# Altium PCB Flex_debugging.PcbDoc
Units mm, origin at the board's own origin, x right, y up, seen from the top; angles counter-clockwise.
Board outline 100 x 30 mm, 2 copper layers (Top Layer, Bottom Layer); 5 components, 30 nets, 94 pads, 45 vias.
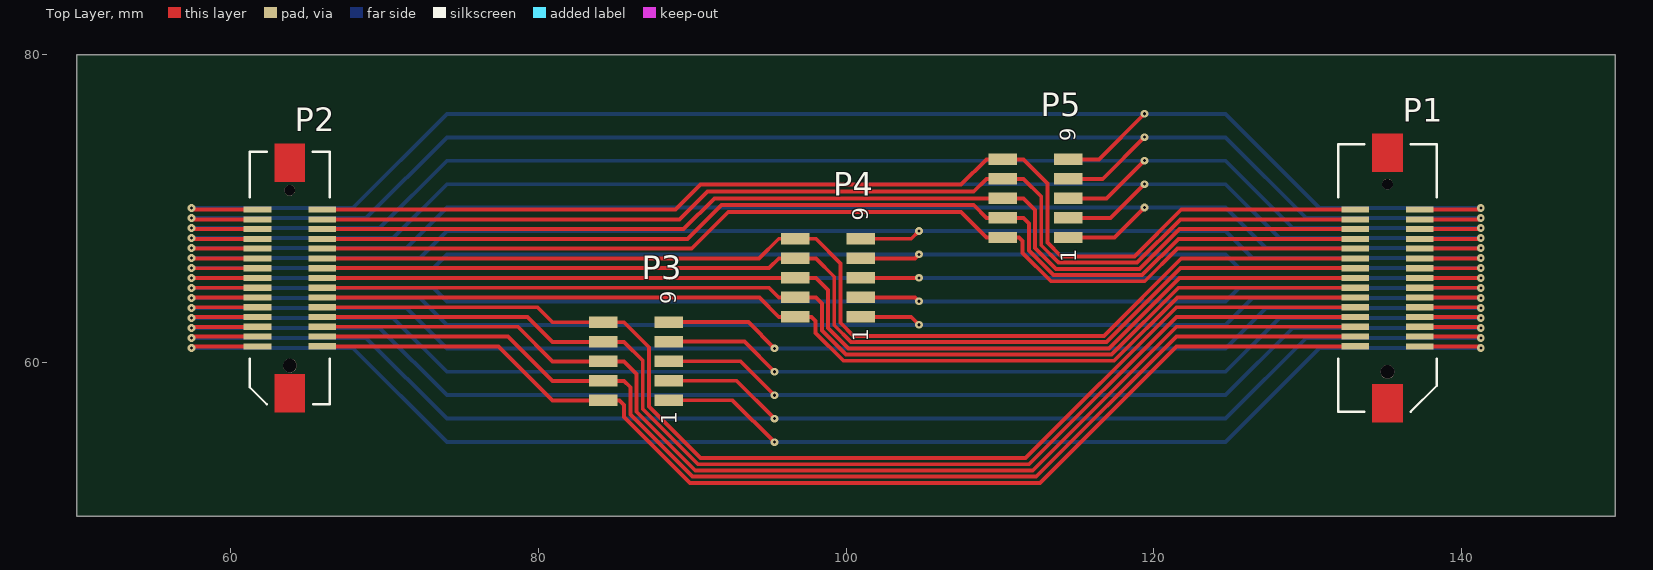
[diagram p0: Top Layer view]
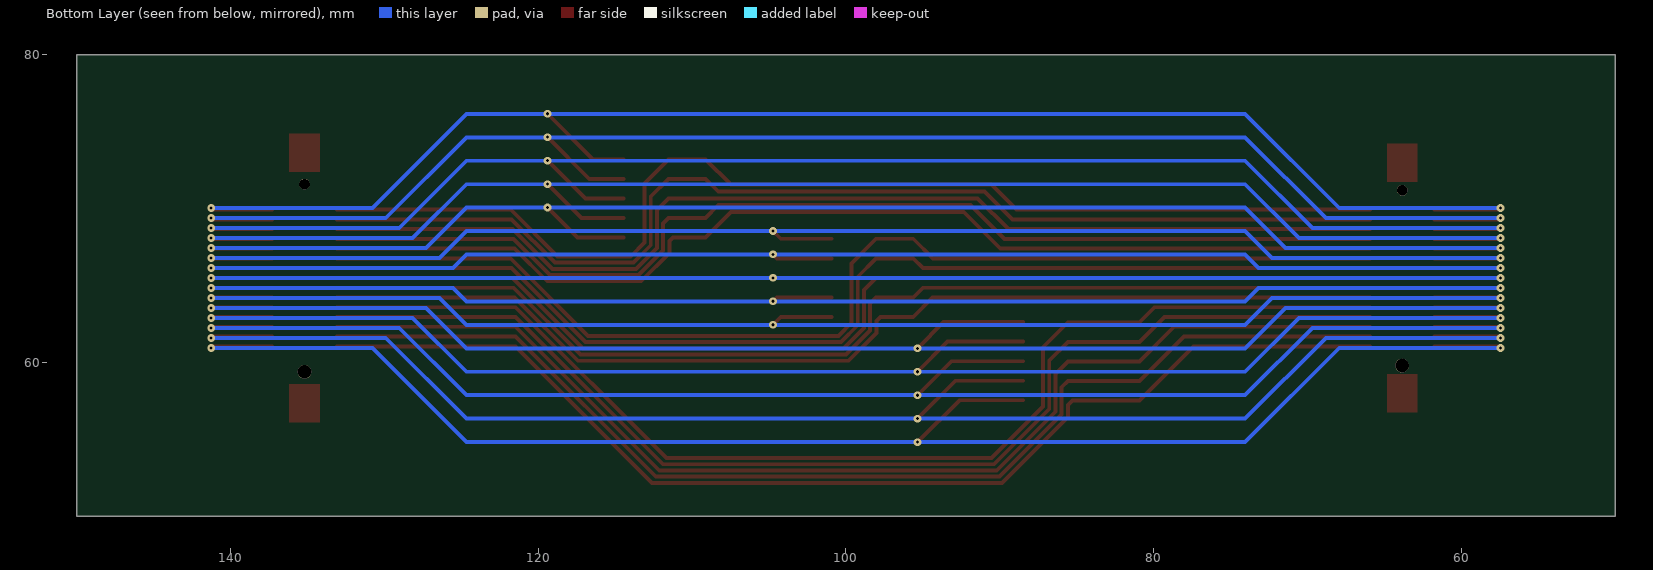
[diagram p1: Bottom Layer view, seen from below]
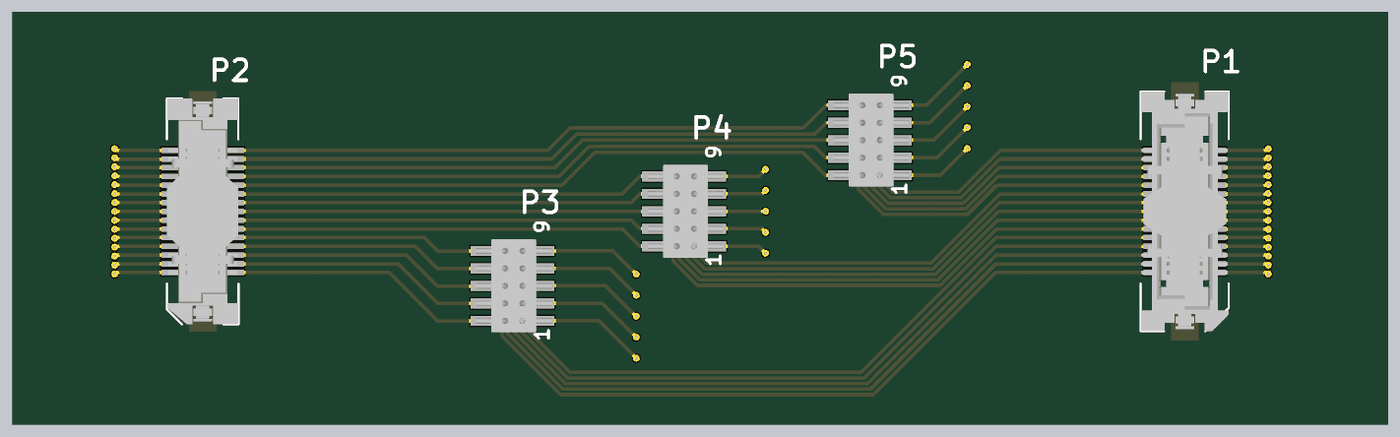
[diagram p2: 3D render of the assembled board from above, using the file's embedded part models]

## Layer stack, top to bottom
Top Solder: solder mask 0.0102, Solder Resist, Dk 3.5
Top Layer: signal copper 0.017
Dielectric 1: dielectric 0.32, FR-4, Dk 4.8
Bottom Layer: signal copper 0.017
Bottom Solder: solder mask 0.0102, Solder Resist, Dk 3.5

## Board outline
50,50 150,50 150,80 50,80

## Design rules (kind name [scope] priority, off if disabled: settings)
Clearance [All] p1: gap=0.15
PolygonConnect [All] p1: connectstyle=Relief reliefconductorwidth=0.254 reliefentries=4 polygonreliefangle="90 Angle" airgapwidth=0.254
RoutingVias [All] p1: holewidth=0.5 width=0.2 viastyle="Through Hole" minholewidth=0.5 minwidth=0.2 maxholewidth=1 maxwidth=0.5
SolderMaskExpansion [All] p1: expansion=0.102
Width [All] p1: maxlimit=0.254 minlimit=0.254 preferedwidth=0.254
29 further rules are at their usual default settings.

## Components (designator, comment, footprint, x,y, rotation, side; value= is the part's Value field where it differs from the comment)
P1 "52885-0374" molex_52885-0374 135.206,65.497 r90 top locked
P2 "53647-0374" molex_53647-0374 63.841,65.497 r90 top locked
P3 "MHDR2X5_SMD" MHDR2X5_SMD 86.35,60.085 r90 top locked
P4 "MHDR2X5_SMD" MHDR2X5_SMD 98.825,65.506 r90 top locked
P5 "MHDR2X5_SMD" MHDR2X5_SMD 112.321,70.672 r90 top locked

## Footprints (in the part's own frame and the unit in brackets; to place one, negate y for a bottom-side part, rotate by r counter-clockwise, add the part's x,y. Pads: shape width x height; smd on the part's side, far side on the other; paste and mask are expansions set on the pad)
MHDR2X5_SMD [mm] "Connector; Header; 5x2 Position SMD"
  rect 0.74x1.85 smd: 1(-2.54,-2.125) 2(-2.54,2.125) 3(-1.27,-2.125) 4(-1.27,2.125) 5(0,-2.125) 6(0,2.125) 7(1.27,-2.125) 8(1.27,2.125) 9(2.54,-2.125) 10(2.54,2.125)
  body extent -3.38,-2.85 3.38,2.85, height 6.3
molex_52885-0374 [mm] "Molex 30-pin 0.635mm pitch receptacle connector"
  round 0.9 hole 0.9 unplated: 0(-6.1,0)
  round 0.7 hole 0.7 unplated: 0(6.1,0)
  rect 0.4x1.8 smd mask+0.12: 1(-4.445,-2.1) 2(-4.443,2.1) 3(-3.81,-2.1) 4(-3.808,2.1) 5(-3.175,-2.1) 6(-3.173,2.1) 7(-2.54,-2.1) 8(-2.538,2.1) 9(-1.905,-2.1) 10(-1.903,2.1) 11(-1.27,-2.1) 12(-1.268,2.1) 13(-0.635,-2.1) 14(-0.633,2.1) 15(0,-2.1) 16(0.002,2.1) 17(0.635,-2.1) 18(0.637,2.1) 19(1.27,-2.1) 20(1.272,2.1) 21(1.905,-2.1) 22(1.907,2.1) 23(2.54,-2.1) 24(2.542,2.1) 25(3.175,-2.1) 26(3.177,2.1) 27(3.81,-2.1) 28(3.812,2.1) 29(4.445,-2.1) 30(4.447,2.1)
  Top Layer region: 9.4,0.995 6.9,0.995 6.9,-1.005 9.4,-1.005
  Top Layer region: -9.4,-1.005 -6.9,-1.005 -6.9,0.995 -9.4,0.995
  silkscreen extent -8.7,-3.2 8.7,3.2, body extent -8.7,-3.2 8.7,3.2, height 4.23
molex_53647-0374 [mm] "Molex 30-pin 0.635mm pitch plug connector"
  round 0.9 hole 0.9 unplated: 0(-5.7,0)
  round 0.7 hole 0.7 unplated: 0(5.7,0)
  rect 0.4x1.8 smd mask+0.12: 1(-4.445,2.1) 2(-4.443,-2.1) 3(-3.81,2.1) 4(-3.808,-2.1) 5(-3.175,2.1) 6(-3.173,-2.1) 7(-2.54,2.1) 8(-2.538,-2.1) 9(-1.905,2.1) 10(-1.903,-2.1) 11(-1.27,2.1) 12(-1.268,-2.1) 13(-0.635,2.1) 14(-0.633,-2.1) 15(0,2.1) 16(0.002,-2.1) 17(0.635,2.1) 18(0.637,-2.1) 19(1.27,2.1) 20(1.272,-2.1) 21(1.905,2.1) 22(1.907,-2.1) 23(2.54,2.1) 24(2.542,-2.1) 25(3.175,2.1) 26(3.177,-2.1) 27(3.81,2.1) 28(3.812,-2.1) 29(4.445,2.1) 30(4.447,-2.1)
  Top Layer region: -8.745,-1 -6.245,-1 -6.245,1 -8.745,1
  Top Layer region: 8.755,1 6.255,1 6.255,-1 8.755,-1
  silkscreen extent -8.2,-2.6 8.2,2.6, body extent -8.2,-2.6 8.2,2.6, height 7.2

## Part data
P1: library part molex_52885-0374, "Molex 30-pin 0.635mm pitch receptacle connector"
P2: library part molex_53647-0374, "Molex 30-pin 0.635mm pitch plug connector"
P3 P4 P5: "Header, 10-Pin, Dual row SMD"

## Via types
v1: diameter 0.5, hole 0.2, Top Layer to Bottom Layer, 45 vias

## Nets (pads, with @x,y where several pads share a name; then routed paths per layer and width w, separated by ;. In a path a pad name is that pad's centre, name@x,y a point inside that pad or via, vN(x,y) a via of type N, cw(c..) or ccw(c..) an arc to the next point about the centre after c; other vN are vias at no path point)
PIN1: P1.1 P2.1 P3.1 | length 105.2
  Top Layer w0.254: v1(57.45,60.947) 57.555,61.052 P2.1 ; P3.1 92.63,57.545 v1(95.35,54.825) ; P1.1 141.17,61.052 v1(141.275,60.947)
  Bottom Layer w0.254: v1(57.45,60.947) 67.932,60.947 74.05,54.829 124.675,54.829 130.793,60.947 v1(141.275,60.947)
PIN2: P1.2 P2.2 P3.2 | length 75
  Top Layer w0.254: P2.2 77.4,61.054 80.917,57.537 84.225,57.537 85.279,57.537 85.575,57.241 85.575,56.465 89.865,52.175 112.6,52.175 121.479,61.054 P1.2
PIN3: P1.3 P2.3 P3.3 | length 104.4
  Top Layer w0.254: v1(57.45,61.597) 57.54,61.687 P2.3 ; P3.3 92.885,58.815 v1(95.35,56.35) ; P1.3 141.185,61.687 v1(141.275,61.597)
  Bottom Layer w0.254: v1(57.45,61.597) 68.806,61.597 74.05,56.353 124.675,56.353 129.919,61.597 v1(141.275,61.597)
PIN4: P1.4 P2.4 P3.4 | length 75.7
  Top Layer w0.254: P2.4 78.035,61.689 80.917,58.807 84.225,58.807 85.565,58.807 85.979,58.393 85.979,56.632 90.032,52.579 112.369,52.579 121.479,61.689 P1.4
PIN5: P1.5 P2.5 P3.5 | length 103.6
  Top Layer w0.254: v1(57.45,62.247) 57.525,62.322 P2.5 ; P3.5 93.14,60.085 v1(95.35,57.875) ; P1.5 141.2,62.322 v1(141.275,62.247)
  Bottom Layer w0.254: v1(57.45,62.247) 69.68,62.247 74.05,57.877 124.675,57.877 129.045,62.247 v1(141.275,62.247)
PIN6: P1.6 P2.6 P3.6 | length 76.3
  Top Layer w0.254: P2.6 78.67,62.324 80.917,60.077 84.225,60.077 85.565,60.077 86.383,59.259 86.383,56.8 90.2,52.983 112.138,52.983 121.479,62.324 P1.6
PIN7: P1.7 P2.7 P3.7 | length 102.7
  Top Layer w0.254: v1(57.45,62.897) 57.51,62.957 P2.7 ; P3.7 93.395,61.355 v1(95.35,59.4) ; P1.7 141.215,62.957 v1(141.275,62.897)
  Bottom Layer w0.254: v1(57.45,62.897) 70.554,62.897 74.05,59.401 124.675,59.401 128.171,62.897 v1(141.275,62.897)
PIN8: P1.8 P2.8 P3.8 | length 76.9
  Top Layer w0.254: P2.8 79.305,62.959 80.917,61.347 84.225,61.347 85.565,61.347 86.787,60.125 86.787,56.967 90.367,53.387 111.907,53.387 121.479,62.959 P1.8
PIN9: P1.9 P2.9 P3.9 | length 101.9
  Top Layer w0.254: v1(57.45,63.547) 57.495,63.592 P2.9 ; P3.9 93.65,62.625 v1(95.35,60.925) ; P1.9 141.23,63.592 v1(141.275,63.547)
  Bottom Layer w0.254: v1(57.45,63.547) 71.428,63.547 74.05,60.925 v1(95.35,60.925) 124.675,60.925 127.297,63.547 v1(141.275,63.547)
PIN10: P1.10 P2.10 P3.10 | length 77.5
  Top Layer w0.254: P2.10 79.94,63.594 80.917,62.617 84.225,62.617 85.565,62.617 87.191,60.991 87.191,57.134 90.534,53.791 111.676,53.791 121.479,63.594 P1.10
PIN11: P1.11 P2.11 P4.1 | length 97.6
  Top Layer w0.254: v1(57.45,64.197) 57.48,64.227 P2.11 ; P4.1 104.242,62.966 v1(104.75,62.458) ; P1.11 141.245,64.227 v1(141.275,64.197)
  Bottom Layer w0.254: v1(57.45,64.197) 72.302,64.197 74.05,62.449 124.675,62.449 126.423,64.197 v1(141.275,64.197)
PIN12: P1.12 P2.12 P4.2 | length 71
  Top Layer w0.254: P2.12 94.367,64.229 95.63,62.966 P4.2 97.754,62.966 98.025,62.695 98.025,61.919 99.828,60.116 117.43,60.116 121.543,64.229 P1.12
PIN13: P1.13 P2.13 P4.3 | length 96.7
  Top Layer w0.254: v1(57.45,64.847) 57.465,64.862 P2.13 ; P4.3 104.496,64.236 v1(104.75,63.982) ; P1.13 141.26,64.862 v1(141.275,64.847)
  Bottom Layer w0.254: v1(57.45,64.847) 73.176,64.847 74.05,63.973 124.675,63.973 125.549,64.847 v1(141.275,64.847)
PIN14: P1.14 P2.14 P4.4 | length 71.8
  Top Layer w0.254: P2.14 95.002,64.864 95.63,64.236 P4.4 98.04,64.236 98.429,63.847 98.429,62.086 99.995,60.52 117.262,60.52 121.606,64.864 P1.14
PIN15: P1.15 P2.15 P4.5 | length 95.9
  Top Layer w0.254: v1(57.45,65.497) P2.15 ; P4.5 v1(104.75,65.506) ; P1.15 v1(141.275,65.497)
  Bottom Layer w0.254: v1(57.45,65.497) v1(141.275,65.497)
PIN16: P1.16 P2.16 P4.6 | length 72.4
  Top Layer w0.254: P2.16 95.623,65.499 95.63,65.506 P4.6 98.04,65.506 98.833,64.713 98.833,62.254 100.163,60.924 117.095,60.924 121.67,65.499 P1.16
PIN17: P1.17 P2.17 P4.7 | length 96.7
  Top Layer w0.254: v1(57.45,66.147) 57.465,66.132 P2.17 ; P4.7 104.496,66.776 v1(104.75,67.03) ; P1.17 141.26,66.132 v1(141.275,66.147)
  Bottom Layer w0.254: v1(57.45,66.147) 73.176,66.147 74.05,67.021 124.675,67.021 125.549,66.147 v1(141.275,66.147)
PIN18: P1.18 P2.18 P4.8 | length 73.5
  Top Layer w0.254: P2.18 94.988,66.134 95.63,66.776 P4.8 98.04,66.776 99.237,65.579 99.237,62.421 100.33,61.328 116.928,61.328 121.734,66.134 P1.18
PIN19: P1.19 P2.19 P4.9 | length 97.6
  Top Layer w0.254: v1(57.45,66.797) 57.48,66.767 P2.19 ; P4.9 104.242,68.046 v1(104.75,68.554) ; P1.19 141.245,66.767 v1(141.275,66.797)
  Bottom Layer w0.254: v1(57.45,66.797) 72.302,66.797 74.05,68.545 124.675,68.545 126.423,66.797 v1(141.275,66.797)
PIN20: P1.20 P2.20 P4.10 | length 74.7
  Top Layer w0.254: P2.20 94.353,66.769 95.63,68.046 P4.10 98.04,68.046 99.641,66.445 99.641,62.588 100.497,61.732 116.76,61.732 121.797,66.769 P1.20
PIN21: P1.21 P2.21 P5.1 | length 100.1
  Top Layer w0.254: v1(57.45,67.447) 57.495,67.402 P2.21 ; P5.1 117.457,68.132 v1(119.4,70.075) ; P1.21 141.23,67.402 v1(141.275,67.447)
  Bottom Layer w0.254: v1(57.45,67.447) 71.428,67.447 74.05,70.069 124.675,70.069 127.297,67.447 v1(141.275,67.447)
PIN22: P1.22 P2.22 P5.2 | length 71.3
  Top Layer w0.254: P2.22 89.971,67.404 92.346,69.779 107.483,69.779 109.13,68.132 P5.2 111.25,68.132 111.484,67.898 111.484,67.122 113.324,65.282 119.421,65.282 121.543,67.404 P1.22
PIN23: P1.23 P2.23 P5.3 | length 100.9
  Top Layer w0.254: v1(57.45,68.097) 57.51,68.037 P2.23 ; P5.3 117.202,69.402 v1(119.4,71.6) ; P1.23 141.215,68.037 v1(141.275,68.097)
  Bottom Layer w0.254: v1(57.45,68.097) 70.554,68.097 74.05,71.593 124.675,71.593 128.171,68.097 v1(141.275,68.097)
PIN24: P1.24 P2.24 P5.4 | length 72
  Top Layer w0.254: P2.24 89.708,68.039 91.897,70.228 108.304,70.228 109.13,69.402 P5.4 111.536,69.402 111.888,69.05 111.888,67.289 113.491,65.686 119.253,65.686 121.606,68.039 P1.24
PIN25: P1.25 P2.25 P5.5 | length 101.7
  Top Layer w0.254: v1(57.45,68.747) 57.525,68.672 P2.25 ; P5.5 116.947,70.672 v1(119.4,73.125) ; P1.25 141.2,68.672 v1(141.275,68.747)
  Bottom Layer w0.254: v1(57.45,68.747) 69.68,68.747 74.05,73.117 124.675,73.117 129.045,68.747 v1(141.275,68.747)
PIN26: P1.26 P2.26 P5.6 | length 72.4
  Top Layer w0.254: P2.26 89.445,68.674 91.448,70.677 109.125,70.677 109.13,70.672 P5.6 111.536,70.672 112.292,69.916 112.292,67.457 113.659,66.09 119.086,66.09 121.67,68.674 P1.26
PIN27: P1.27 P2.27 P5.7 | length 102.6
  Top Layer w0.254: v1(57.45,69.397) 57.54,69.307 P2.27 ; P5.7 116.692,71.942 v1(119.4,74.65) ; P1.27 141.185,69.307 v1(141.275,69.397)
  Bottom Layer w0.254: v1(57.45,69.397) 68.806,69.397 74.05,74.641 124.675,74.641 129.919,69.397 v1(141.275,69.397)
PIN28: P1.28 P2.28 P5.8 | length 73.5
  Top Layer w0.254: P2.28 89.182,69.309 90.989,71.116 108.304,71.116 109.13,71.942 P5.8 111.536,71.942 112.696,70.782 112.696,67.624 113.826,66.494 118.919,66.494 121.734,69.309 P1.28
PIN29: P1.29 P2.29 P5.9 | length 103.4
  Top Layer w0.254: v1(57.45,70.047) 57.555,69.942 P2.29 ; P5.9 116.437,73.212 v1(119.4,76.175) ; P1.29 141.17,69.942 v1(141.275,70.047)
  Bottom Layer w0.254: v1(57.45,70.047) 67.932,70.047 74.05,76.165 124.675,76.165 130.793,70.047 v1(141.275,70.047)
PIN30: P1.30 P2.30 P5.10 | length 74.7
  Top Layer w0.254: P2.30 88.919,69.944 90.54,71.565 107.483,71.565 109.13,73.212 P5.10 111.536,73.212 113.1,71.648 113.1,67.791 113.993,66.898 118.751,66.898 121.797,69.944 P1.30
pads on no net: P1.0 P2.0

## Silkscreen, mask and mechanical layers (free items; w line width, h text height)
Mechanical 1:
  the board outline again, w0.05
Drill Drawing:
  drawing of 276 lines, arcs and shapes, not listed
  text "Fabrication / Assembly Notes" at 50.305,173.457 h1.52
  text "1. Material: Flex" at 50.305,170.457 h1.52
  text "2. Number of electrical layers: 2" at 50.305,167.457 h1.52
  text "3. Trace / Space minimum: 0.15 mm (all layers)" at 50.305,164.457 h1.52
  text "4. Thickness: 0.38 mm (finished)" at 50.305,161.457 h1.52
  text "5. Finish:  ENIG plating on exposed copper" at 50.305,158.457 h1.52
  text "6. Soldermask: per IPC-SM-840, color green registration within +/- 50um of circuit layer" at 50.305,155.457 h1.52
  text "7. Silkscreen: do print silkscreen on top layer" at 50.305,152.457 h1.52
  text "8. RoHS: parts shall be RoHS compliant as per European Union directive 2002/95/EC" at 50.305,149.457 h1.52
  text "9. Board must be lead free process compatible and able to withstand minimum of" at 50.305,146.457 h1.52
  text "5 cycles at 250 degrees celsius" at 54.805,143.457 h1.52
  text "10. All Test/QA/QC markings to be made on back side of PCB" at 50.305,140.457 h1.52
  text "Layer" at 51.524,135.498 h1.52
  text "Name" at 61.936,135.498 h1.52
  text "Material" at 85.551,135.498 h1.52
  text "Thickness" at 107.389,135.498 h1.52
  text "Constant" at 123.895,135.498 h1.52
  text "Board Layer Stack" at 138.37,135.498 h1.52
  text "1" at 51.524,132.45 h1.52
  text "Top Paste" at 61.936,132.45 h1.52
  text "2" at 51.524,129.402 h1.52
  text "Top Overlay" at 61.936,129.402 h1.52
  text "3" at 51.524,126.354 h1.52
  text "Top Solder" at 61.936,126.354 h1.52
  text "Solder Resist" at 85.551,126.354 h1.52
  text "0.010mm" at 107.389,126.354 h1.52
  text "3.5" at 123.895,126.354 h1.52
  text "4" at 51.524,123.306 h1.52
  text "Top Layer" at 61.936,123.306 h1.52
  text "Copper" at 85.551,123.306 h1.52
  text "0.017mm" at 107.389,123.306 h1.52
  text "5" at 51.524,120.258 h1.52
  text "Dielectric 1" at 61.936,120.258 h1.52
  text "FR-4" at 85.551,120.258 h1.52
  text "0.320mm" at 107.389,120.258 h1.52
  text "4.8" at 123.895,120.258 h1.52
  text "6" at 51.524,117.21 h1.52
  text "Bottom Layer" at 61.936,117.21 h1.52
  text "Copper" at 85.551,117.21 h1.52
  text "0.017mm" at 107.389,117.21 h1.52
  text "7" at 51.524,114.162 h1.52
  text "Bottom Solder" at 61.936,114.162 h1.52
  text "Solder Resist" at 85.551,114.162 h1.52
  text "0.010mm" at 107.389,114.162 h1.52
  text "3.5" at 123.895,114.162 h1.52
  text "8" at 51.524,111.114 h1.52
  text "Bottom Overlay" at 61.936,111.114 h1.52
  text "9" at 51.524,108.066 h1.52
  text "Bottom Paste" at 61.936,108.066 h1.52
  text "Symbol" at 52.286,98.333 h1.83
  text "Hit Count" at 65.135,98.333 h1.83
  text "Finished Hole Size" at 82.86,98.333 h1.83
  text "Plated" at 117.038,98.333 h1.83
  text "Hole Type" at 129.887,98.333 h1.83
  text "2" at 65.135,94.523 h1.52
  text "0.700mm (27.56mil)" at 82.86,94.523 h1.52
  text "NPTH" at 117.038,94.523 h1.52
  text "Round" at 129.887,94.523 h1.52
  text "2" at 65.135,90.713 h1.52
  text "0.900mm (35.43mil)" at 82.86,90.713 h1.52
  text "NPTH" at 117.038,90.713 h1.52
  text "Round" at 129.887,90.713 h1.52
  text "45" at 65.135,86.903 h1.52
  text "0.200mm (7.87mil)" at 82.86,86.903 h1.52
  text "PTH" at 117.038,86.903 h1.52
  text "Round" at 129.887,86.903 h1.52
  text "49 Total" at 65.135,83.093 h1.52

## Dimensions
150,80 to 150,50 on Drill Drawing
150,50 to 50,50 on Drill Drawing

## Text inside footprints (layer, text, board x,y; h text height)
P3: Top Overlay "1" at 88.983,55.945 h1 r90; Top Overlay "9" at 88.975,63.785 h1 r90
P4: Top Overlay "1" at 101.458,61.366 h1 r90; Top Overlay "9" at 101.45,69.206 h1 r90
P5: Top Overlay "1" at 114.954,66.532 h1 r90; Top Overlay "9" at 114.946,74.372 h1 r90